# EAGLE board CT_schematic (EAGLE 7.6.0)

Size 100 x 80 mm. Coordinates in mm from the lower left corner, seen from the top.
Outline: 0,0 100,0 100,80 0,80 0,0
Copper layers (1*16): Top 0.035mm / dielectric 1.5mm / Bottom 0.035mm
Design rules "default": minimum track width 10mil, minimum drill 24mil, track to track 8mil, track to pad 8mil, pad to pad 8mil, via to via 8mil, smd to smd 8mil, copper to edge 40mil, drill to drill 8mil, minimum pad ring 10mil, minimum via ring 8mil, stop-mask expansion 4mil, vias tented up to drill 0mil, thermal gap 10mil

## Footprints (pad centres in the part's own frame; a part is rotated, then mirrored left to right if it is on the bottom)
C0603 = smd 0.8 x 0.8: 1 -0.762,0; 2 0.762,0
C0402 = smd 0.5 x 0.5: 1 -0.508,0; 2 0.508,0
C0805 = smd 1.2 x 1.3: 1 -1.016,0; 2 1.016,0
C1206 = smd 1.3 x 1.6: 1 -1.524,0; 2 1.524,0
C1210 = smd 1.2 x 2.5: 1 -1.524,0; 2 1.524,0
EXV-9H = smd 3.505 x 1.676: 1 -2.857,0; 2 2.857,0
L0603 = smd 0.8 x 0.8: 1 -0.762,0; 2 0.762,0
L1210 = smd 1.2 x 2.5: 1 -1.524,0; 2 1.524,0
PJ-037B_PACKAGE = drill 3.7 square: 1 12,0 | drill 3.2 square: 2 6,0
R0603 = smd 0.8 x 0.8: 1 -0.762,0; 2 0.762,0
UFQFPN48 = smd 0.559 x 0.305: 1 -3.375,2.751; 2 -3.375,2.251; 3 -3.375,1.75; 4 -3.375,1.25; 5 -3.375,0.75; 6 -3.375,0.25; 7 -3.375,-0.25; 8 -3.375,-0.75; 9 -3.375,-1.25; 10 -3.375,-1.75; 11 -3.375,-2.251; 12 -3.375,-2.751; 25 3.375,-2.751; 26 3.375,-2.251; 27 3.375,-1.75; 28 3.375,-1.25; 29 3.375,-0.75; 30 3.375,-0.25; 31 3.375,0.25; 32 3.375,0.75; 33 3.375,1.25; 34 3.375,1.75; 35 3.375,2.251; 36 3.375,2.751 | smd 0.305 x 0.559: 13 -2.751,-3.375; 14 -2.251,-3.375; 15 -1.75,-3.375; 16 -1.25,-3.375; 17 -0.75,-3.375; 18 -0.25,-3.375; 19 0.25,-3.375; 20 0.75,-3.375; 21 1.25,-3.375; 22 1.75,-3.375; 23 2.251,-3.375; 24 2.751,-3.375; 37 2.751,3.375; 38 2.251,3.375; 39 1.75,3.375; 40 1.25,3.375; 41 0.75,3.375; 42 0.25,3.375; 43 -0.25,3.375; 44 -0.75,3.375; 45 -1.25,3.375; 46 -1.75,3.375; 47 -2.251,3.375; 48 -2.751,3.375 | smd 5.588 x 5.588: 49 0,0
SOIC-8 = smd 1.6 x 0.6: 1 -2.7,1.905 | smd 1.55 x 0.6: 2 -2.7,0.635; 3 -2.7,-0.635; 4 -2.7,-1.905; 5 2.7,-1.905; 6 2.7,-0.635; 7 2.7,0.635; 8 2.7,1.905
ETRX3587 = smd 1 x 1.4: 1 0,0; 2 1.27,0; 3 2.54,0; 4 3.81,0; 5 5.08,0; 6 6.35,0; 7 7.62,0; 8 8.89,0; 9 10.16,0; 10 11.43,0; 11 12.7,0; 12 13.97,0; 13 15.24,0; 14 16.51,0; 15 17.78,0; 16 19.05,0; 17 20.32,0; 18 21.59,0; 19 22.86,0; 20 22.86,18.8; 21 21.59,18.8; 22 20.32,18.8; 23 19.05,18.8; 24 17.78,18.8; 25 16.51,18.8; 26 15.24,18.8; 27 13.97,18.8; 28 12.7,18.8; 29 11.43,18.8; 30 10.16,18.8; 31 8.89,18.8; 32 7.62,18.8; 33 6.35,18.8
SAMTEC_FTSH-105-01-L-DV-K = smd 0.762 x 2.794: 1 -2.54,-2.032; 2 -2.54,2.032; 3 -1.27,-2.032; 4 -1.27,2.032; 5 0,-2.032; 6 0,2.032; 7 1.27,-2.032; 8 1.27,2.032; 9 2.54,-2.032; 10 2.54,2.032
SSOP-20 = smd 1.651 x 0.432: 1 -3.48,2.925; 2 -3.48,2.275; 3 -3.48,1.625; 4 -3.48,0.975; 5 -3.48,0.325; 6 -3.48,-0.325; 7 -3.48,-0.975; 8 -3.48,-1.625; 9 -3.48,-2.275; 10 -3.48,-2.925; 11 3.48,-2.925; 12 3.48,-2.275; 13 3.48,-1.625; 14 3.48,-0.975; 15 3.48,-0.325; 16 3.48,0.325; 17 3.48,0.975; 18 3.48,1.625; 19 3.48,2.275; 20 3.48,2.925
182-009-MALE = drill 1.194 pad 1.524 octagon: 1 -5.537,10.923; 2 -2.769,10.923; 3 0,10.923; 4 2.769,10.923; 5 5.537,10.923; 6 -4.153,8.08; 7 -1.384,8.08; 8 1.384,8.08; 9 4.153,8.08 | hole 3.048: -12.446,9.501; 12.446,9.501
QFN65P400X400X100-17N = smd 1.016 x 0.356: 1 -1.803,0.965; 2 -1.803,0.33; 3 -1.803,-0.33; 4 -1.803,-0.965; 9 1.803,-0.965; 10 1.803,-0.33; 11 1.803,0.33; 12 1.803,0.965 | smd 0.356 x 1.016: 5 -0.965,-1.803; 6 -0.33,-1.803; 7 0.33,-1.803; 8 0.965,-1.803; 13 0.965,1.803; 14 0.33,1.803; 15 -0.33,1.803; 16 -0.965,1.803 | smd 2.108 x 2.108: 17 0,0
HTSS-105-01-G-D = drill 1 pad 1.8 square: 1 0,0 | drill 1 pad 1.8: 2 0,2.54; 3 2.54,0; 4 2.54,2.54; 5 5.08,0; 6 5.08,2.54; 7 7.62,0; 8 7.62,2.54; 9 10.16,0; 10 10.16,2.54
ASEK = smd 1.4 x 1: 1 -1.1,-0.8; 2 1.1,-0.8; 3 1.1,0.8; 4 -1.1,0.8
ASFL1 = smd 1.7 x 1.5: 1 -1.27,-1.1; 2 1.27,-1.1; 3 1.27,1.1; 4 -1.27,1.1
WSON-8 = smd 0.3 x 0.6: 1 -0.75,0; 2 0.05,0; 3 0.85,0; 4 1.65,0; 5 1.65,3.8; 6 0.85,3.8; 7 0.05,3.8; 8 -0.75,3.8 | smd 3 x 2.6: PAD 0.45,1.9
SON-6 = smd 0.55 x 0.3: 1 -0.355,0.5 | smd 0.52 x 0.3: 2 -0.37,0; 3 -0.37,-0.5; 4 0.37,-0.5; 5 0.37,0; 6 0.37,0.5
SW_4-1437565-2 = smd 1.4 x 2.1: 1 -2.23,4.55; 2 -2.23,-4.55; 3 2.23,4.55; 4 2.23,-4.55
LGM67K-G1J2-24-Z = smd 0.8 x 1.4: A -2,0; C 0,0
NC7SZ125M5X = smd 1.3 x 0.7: 1 -1.3,0.95; 2 -1.3,0; 3 -1.3,-0.95; 4 1.3,-0.95; 5 1.3,0.95

## Placement (x,y rotation side)
C1  1e-07  [C0603]  -27.94,93.98 0 top  (outside the outline)
C2  1e-07  [C0603]  -31.75,93.98 0 top  (outside the outline)
C3  1e-07  [C0603]  -35.56,93.98 0 top  (outside the outline)
C4  1e-07  [C0603]  -39.37,93.98 0 top  (outside the outline)
C5  4.7e-06  [C0603]  -24.13,93.98 0 top  (outside the outline)
C6  1e-07  [C0603]  -43.18,93.98 0 top  (outside the outline)
C7  1e-08  [C0603]  -46.99,93.98 0 top  (outside the outline)
C8  1e-06  [C0603]  -50.8,93.98 0 top  (outside the outline)
C9  1e-08  [C0402]  -41.91,99.06 0 top  (outside the outline)
C10  1e-07  [C0402]  -45.72,99.06 0 top  (outside the outline)
C11  1e-07  [C0402]  -49.53,99.06 0 top  (outside the outline)
C12  1e-06  [C0603]  -54.61,93.98 0 top  (outside the outline)
C13  1e-06  [C0603]  -58.42,93.98 0 top  (outside the outline)
C14  1e-06  [C0603]  -62.23,93.98 0 top  (outside the outline)
C15  4.7e-06  [C0805]  -66.04,82.55 0 top  (outside the outline)
C16  1e-07  [C0402]  -53.34,99.06 0 top  (outside the outline)
C17  1e-07  [C0402]  -57.15,99.06 0 top  (outside the outline)
C18  1e-06  [C0603]  -66.04,93.98 0 top  (outside the outline)
C19  1e-08  [C0402]  -60.96,99.06 0 top  (outside the outline)
C20  1e-08  [C0402]  -64.77,99.06 0 top  (outside the outline)
C21  1e-08  [C0402]  -68.58,99.06 0 top  (outside the outline)
C22  1e-05  [C1206]  -41.91,82.55 0 top  (outside the outline)
C23  1e-05  [C1210]  -29.21,82.55 0 top  (outside the outline)
C24  1e-07  [C0402]  -72.39,99.06 0 top  (outside the outline)
C25  0.0001  [EXV-9H]  -66.04,74.93 0 top  (outside the outline)
C26  0.0001  [EXV-9H]  -77.47,74.93 0 top  (outside the outline)
C27  1e-08  [C0402]  -76.2,99.06 0 top  (outside the outline)
C28  1e-08  [C0402]  -80.01,99.06 0 top  (outside the outline)
C29  1e-08  [C0402]  -83.82,99.06 0 top  (outside the outline)
F1  240.0  [L0603]  -69.85,93.98 0 top  (outside the outline)
I1  1.5e-05  [L1210]  -35.56,82.55 0 top  (outside the outline)
J1  PJ-037B  [PJ-037B_PACKAGE]  -57.15,52.07 0 top  (outside the outline)
R1  10000.0  [R0603]  -30.48,88.9 0 top  (outside the outline)
R2  1000.0  [R0603]  -73.66,93.98 0 top  (outside the outline)
R3  1600.5  [R0603]  -77.47,93.98 0 top  (outside the outline)
R4  4700.0  [R0603]  -81.28,93.98 0 top  (outside the outline)
R5  4700.0  [R0603]  -85.09,93.98 0 top  (outside the outline)
R6  2200.0  [R0603]  -15.24,99.06 0 top  (outside the outline)
R7  2200.0  [R0603]  -19.05,99.06 0 top  (outside the outline)
R8  10000.0  [R0603]  -35.56,88.9 0 top  (outside the outline)
R9  10000.0  [R0603]  -40.64,88.9 0 top  (outside the outline)
R10  10000.0  [R0603]  -45.72,88.9 0 top  (outside the outline)
R11  10000.0  [R0603]  -50.8,88.9 0 top  (outside the outline)
R12  10000.0  [R0603]  -55.88,88.9 0 top  (outside the outline)
R13  10000.0  [R0603]  -60.96,88.9 0 top  (outside the outline)
R14  10000.0  [R0603]  -66.04,88.9 0 top  (outside the outline)
R15  10000.0  [R0603]  -71.12,88.9 0 top  (outside the outline)
R16  5.0  [R0603]  -22.86,99.06 0 top  (outside the outline)
R17  100000.0  [R0603]  -71.12,82.55 0 top  (outside the outline)
R18  100000.0  [R0603]  -76.2,82.55 0 top  (outside the outline)
R19  100000.0  [R0603]  -81.28,82.55 0 top  (outside the outline)
R20  10000.0  [R0603]  -76.2,88.9 0 top  (outside the outline)
R21  10000.0  [R0603]  -81.28,88.9 0 top  (outside the outline)
R22  47.0  [R0603]  -26.67,99.06 0 top  (outside the outline)
R23  100000.0  [R0603]  -15.24,88.9 0 top  (outside the outline)
R24  2231.0  [R0603]  -30.48,99.06 0 top  (outside the outline)
R25  1000.0  [R0603]  -34.29,99.06 0 top  (outside the outline)
R26  10000.0  [R0603]  -15.24,93.98 0 top  (outside the outline)
R27  10000.0  [R0603]  -20.32,93.98 0 top  (outside the outline)
R28  9100.0  [R0603]  -38.1,99.06 0 top  (outside the outline)
R29  680000.0  [R0603]  -20.32,88.9 0 top  (outside the outline)
R30  120000.0  [R0603]  -25.4,88.9 0 top  (outside the outline)
U1  STM32L152CCU6  [UFQFPN48]  -17.78,74.93 0 top  (outside the outline)
U2  AT25256B-SSHL-T  [SOIC-8]  -43.18,64.77 0 top  (outside the outline)
U3  ETRX3587  [ETRX3587]  -48.26,1.27 0 top  (outside the outline)
U4  FTSH-105-01-L-DV-K  [SAMTEC_FTSH-105-01-L-DV-K]  -35.56,53.34 0 top  (outside the outline)
U5  MAX3218EAP+T  [SSOP-20]  -53.34,64.77 0 top  (outside the outline)
U6  182-009-113R531  [182-009-MALE]  -36.83,29.21 0 top  (outside the outline)
U7  TSC2013QRSARQ1  [QFN65P400X400X100-17N]  -74.93,30.48 0 top  (outside the outline)
U8  HTSS-105-01-G-D  [HTSS-105-01-G-D]  -27.94,64.77 0 top  (outside the outline)
U9  ASEK-32.768KHz-ECST  [ASEK]  -57.15,74.93 0 top  (outside the outline)
U10  ASFL1-25MHZ-NCS  [ASFL1]  -36.83,74.93 0 top  (outside the outline)
U11  LP3878SDX-ADJ/NOPB  [WSON-8]  -76.2,63.5 0 top  (outside the outline)
U12  TPS3895ADRYR  [SON-6]  -13.97,102.87 0 top  (outside the outline)
U13  4-1437565-2  [SW_4-1437565-2]  -73.66,50.8 0 top  (outside the outline)
U14  Q65110A2395  [LGM67K-G1J2-24-Z]  -17.78,82.55 0 top  (outside the outline)
U15  nc7sz125m5x  [NC7SZ125M5X]  -46.99,81.28 0 top  (outside the outline)
U16  nc7sz125m5x  [NC7SZ125M5X]  -53.34,81.28 0 top  (outside the outline)
U17  nc7sz125m5x  [NC7SZ125M5X]  -59.69,81.28 0 top  (outside the outline)

## Library data of the parts
C1-C29 F1 I1 J1 R1-R30 U1-U17 = circuit_tree

## Nets
CLK_U1_3: U1.3 U9.3
CLK_U1_5: U1.5 U10.3
GND: C1.2 C2.2 C3.2 C4.2 C5.2 C6.2 C7.2 C8.2 C9.2 C10.2 C11.2 C12.2 C13.2 C14.2 C19.2 C20.2 C21.2 C22.2 C23.2 C24.2 C25.2 C26.2 C27.2 C28.2 C29.2 J1.2 R2.2 R8.2 R12.2 R16.2 R25.2 R28.2 R30.2 U1.8 U1.23 U1.35 U1.47 U1.49 U2.4 U3.1 U3.13 U3.19 U3.20 U3.31 U3.33 U4.3 U4.5 U5.5 U5.17 U5.20 U6.5 U7.17 U8.9 U9.2 U10.2 U11.3 U11.PAD U12.2 U14.C U15.2 U15.3 U16.1 U16.3 U17.1 U17.3
NET_U1_1: C6.1 U1.1
NET_U1_7: R5.1 U1.7 U17.4
NET_U1_9: C7.1 C8.1 F1.1 U1.9
NET_U1_42: R6.1
NET_U1_43: R7.1 U1.43 U7.1
NET_U1_44: R8.1 U1.44
NET_U1_45: R3.1 U1.45 U14.A
NET_U1_46: R1.1 U1.46 U13.3 U13.4
NET_U2_3: R9.1 U2.3
NET_U2_7: R11.1 U2.7
NET_U3_7: R4.1 U3.7 U16.4
NET_U3_21: R12.1 U3.21
NET_U4_9: R16.1 U4.9
NET_U5_1: I1.1 U5.1
NET_U5_2: R17.1 U5.2
NET_U5_3: R18.1 U5.3
NET_U5_4: R19.1 U5.4
NET_U5_15: C14.1 U5.15
NET_U5_16: C15.2 U5.16
NET_U5_18: C15.1 U5.18
NET_U5_19: C13.1 U5.19
NET_U6_2: U5.12 U6.2
NET_U6_3: U5.14 U6.3
NET_U6_7: U5.11 U6.7
NET_U6_8: U5.13 U6.8
NET_U7_4: R21.1 U7.4
NET_U7_5: R20.1 U7.5
NET_U7_9: C16.2 C17.2 C18.2 R22.2 U7.9
NET_U7_15: R22.1 U7.8 U7.15
NET_U8_3: U7.12 U8.3
NET_U8_4: U7.14 U8.4
NET_U8_5: U7.11 U8.5
NET_U8_6: U7.13 U8.6
NET_U11_1: C21.1 U11.1
NET_U11_6: R24.2 R25.1 U11.6
NET_U11_8: R23.1 U11.8
NET_U12_1: R27.1 R28.1 U12.1
NET_U12_3: R29.2 R30.1 U12.3
NET_U12_4: R26.1 U12.4 U15.4 U16.2 U17.2
NET_U13_1: R2.1 U13.1 U13.2
PROC_SPI1_MISO: U1.16 U2.2
PROC_SPI1_MOSI: U1.17 U2.5
PROC_SPI1_NSS: R10.1 U1.14 U2.1
PROC_SPI1_SCK: U1.15 U2.6
PROC_SYS_JTCK_SWCLK: R14.1 U1.37 U4.4
PROC_SYS_JTDO_TRACESWO: U1.39 U4.6
PROC_SYS_JTMS_SWDIO: R15.1 U1.34 U4.2
PROC_USART1_CTS: U1.32 U3.8
PROC_USART1_RTS: U1.33 U3.6
PROC_USART1_RX: U1.31 U3.17
PROC_USART1_TX: U1.30 U3.18
PROC_USART2_CTS: U1.10 U5.8
PROC_USART2_RTS: U1.11 U5.10
PROC_USART2_RX: U1.13 U5.9
PROC_USART2_TX: U1.12 U5.7
RST_OUT_U4_JTAG_RST_B: R13.1 U4.10 U15.1
VCC_S1_9V7: C22.1 C25.1 C26.1 J1.1 R23.2 U11.4
VCC_TIER1_3V3: C1.1 C2.1 C3.1 C4.1 C5.1 C9.1 C10.1 C11.1 C12.1 C16.1 C17.1 C18.1 C19.1 C20.1 C23.1 C24.1 C27.1 C28.1 C29.1 F1.2 I1.2 R1.2 R3.2 R4.2 R5.2 R6.2 R7.2 R9.2 R10.2 R11.2 R13.2 R14.2 R15.2 R17.2 R18.2 R19.2 R20.2 R21.2 R24.1 R26.2 R27.2 R29.1 U1.24 U1.36 U1.48 U2.8 U3.32 U4.1 U5.6 U7.7 U7.10 U9.4 U10.4 U11.5 U12.6 U15.5 U16.5 U17.5

## Tracks (layer width: path | path; a pad name or v marks a point on that pad's centre or on a via)
CLK_U1_3  (1 unrouted)
CLK_U1_5  (1 unrouted)
GND  (64 unrouted)
NET_U1_1  (1 unrouted)
NET_U1_7  (2 unrouted)
NET_U1_9  (3 unrouted)
NET_U1_43  (2 unrouted)
NET_U1_44  (1 unrouted)
NET_U1_45  (2 unrouted)
NET_U1_46  (3 unrouted)
NET_U2_3  (1 unrouted)
NET_U2_7  (1 unrouted)
NET_U3_7  (2 unrouted)
NET_U3_21  (1 unrouted)
NET_U4_9  (1 unrouted)
NET_U5_1  (1 unrouted)
NET_U5_2  (1 unrouted)
NET_U5_3  (1 unrouted)
NET_U5_4  (1 unrouted)
NET_U5_15  (1 unrouted)
NET_U5_16  (1 unrouted)
NET_U5_18  (1 unrouted)
NET_U5_19  (1 unrouted)
NET_U6_2  (1 unrouted)
NET_U6_3  (1 unrouted)
NET_U6_7  (1 unrouted)
NET_U6_8  (1 unrouted)
NET_U7_4  (1 unrouted)
NET_U7_5  (1 unrouted)
NET_U7_9  (4 unrouted)
NET_U7_15  (2 unrouted)
NET_U8_3  (1 unrouted)
NET_U8_4  (1 unrouted)
NET_U8_5  (1 unrouted)
NET_U8_6  (1 unrouted)
NET_U11_1  (1 unrouted)
NET_U11_6  (2 unrouted)
NET_U11_8  (1 unrouted)
NET_U12_1  (2 unrouted)
NET_U12_3  (2 unrouted)
NET_U12_4  (4 unrouted)
NET_U13_1  (2 unrouted)
PROC_SPI1_MISO  (1 unrouted)
PROC_SPI1_MOSI  (1 unrouted)
PROC_SPI1_NSS  (2 unrouted)
PROC_SPI1_SCK  (1 unrouted)
PROC_SYS_JTCK_SWCLK  (2 unrouted)
PROC_SYS_JTDO_TRACESWO  (1 unrouted)
PROC_SYS_JTMS_SWDIO  (2 unrouted)
PROC_USART1_CTS  (1 unrouted)
PROC_USART1_RTS  (1 unrouted)
PROC_USART1_RX  (1 unrouted)
PROC_USART1_TX  (1 unrouted)
PROC_USART2_CTS  (1 unrouted)
PROC_USART2_RTS  (1 unrouted)
PROC_USART2_RX  (1 unrouted)
PROC_USART2_TX  (1 unrouted)
RST_OUT_U4_JTAG_RST_B  (2 unrouted)
VCC_S1_9V7  (5 unrouted)
VCC_TIER1_3V3  (57 unrouted)